# EAGLE board MegaU4Dev_SnR (EAGLE 5.11), part 1 of 2
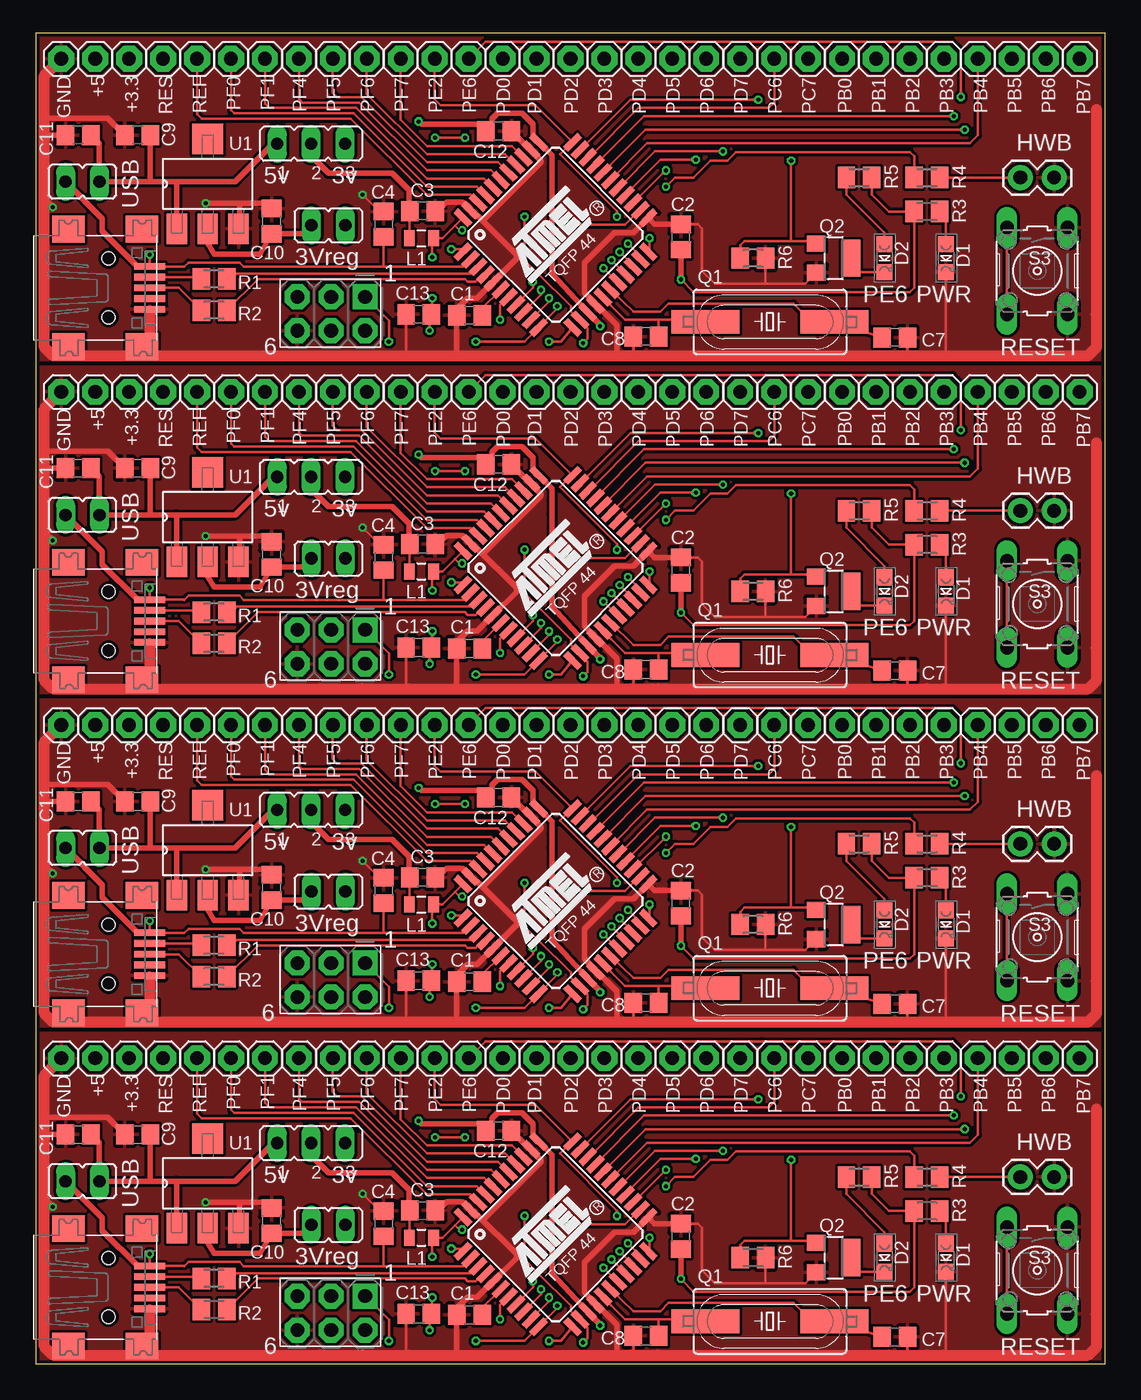
[diagram p0: board, top side]
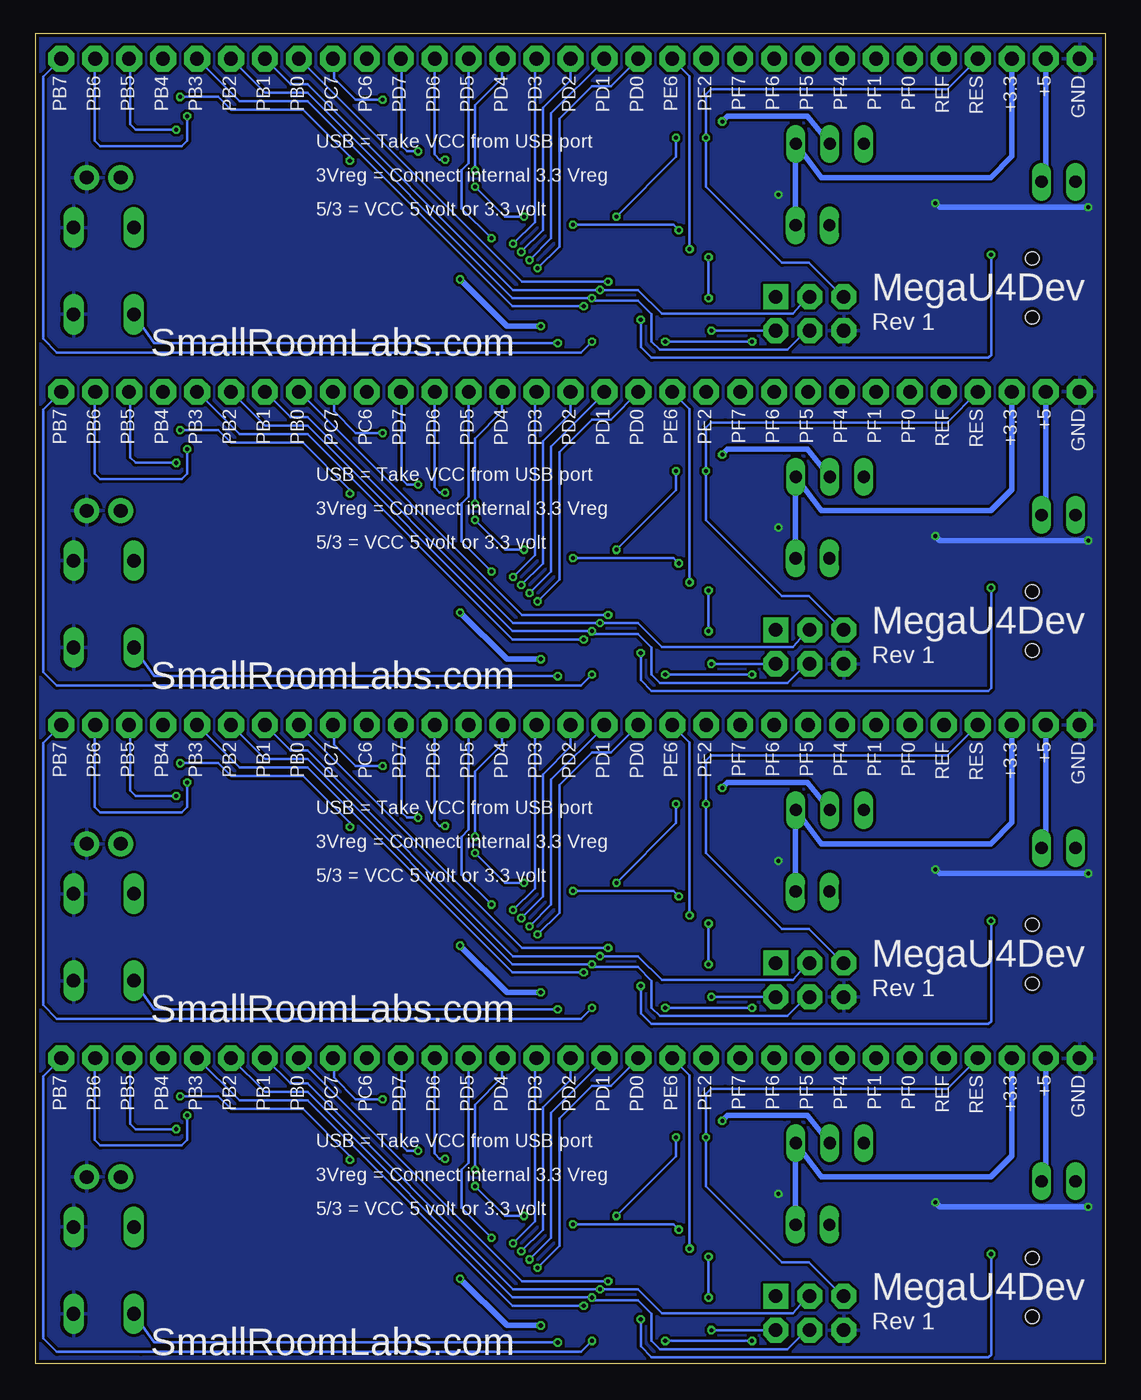
[diagram p1: board, bottom side, seen from below]

Size 80 x 99.52 mm. Coordinates in mm from the lower left corner, seen from the top.
Outline: 0,0 80,0 80,99.52 0,99.52 0,0
Copper layers (1*16): Top 0.035mm / dielectric 1.5mm / Bottom 0.035mm
Design rules "Fusion_eagle_rule_v1.1": minimum track width 6mil, minimum drill 12mil, track to track 6mil, track to pad 6mil, pad to pad 6mil, via to via 6mil, smd to smd 0mil, copper to edge 10mil, drill to drill 10mil, minimum pad ring 10mil, minimum via ring 6mil, stop-mask expansion 2mil, vias tented up to drill 100mil, thermal gap 10mil
Net classes: 0 default: width 0.203 mm, clearance 0.203 mm

## Footprints (pad centres in the part's own frame; a part is rotated, then mirrored left to right if it is on the bottom)
1X01 = drill 1.016 pad 1.93 octagon: 1 0,0
C0805 = smd 1.3 x 1.5: 1 -0.95,0; 2 0.95,0
USB-MINIB = smd 0.5 x 2.308: D+ 0,4.064; D- -0.8,4.064; GND 1.6,4.064; ID 0.8,4.064; VBUS -1.6,4.064 | smd 2 x 2.4: GND1 -4.4,-2; GND2 -4.4,3.5; GND3 4.4,3.5; GND4 4.4,-2 | hole 1: -2.2,1; 2.2,1
CHIPLED_0805 = smd 1.2 x 1.2: A 0,-1.05; C 0,1.05
TQFP44 = smd 1.5 x 0.5: 1 -5.8,4; 2 -5.8,3.2; 3 -5.8,2.4; 4 -5.8,1.6; 5 -5.8,0.8; 6 -5.8,0; 7 -5.8,-0.8; 8 -5.8,-1.6; 9 -5.8,-2.4; 10 -5.8,-3.2; 11 -5.8,-4; 23 5.8,-4; 24 5.8,-3.2; 25 5.8,-2.4; 26 5.8,-1.6; 27 5.8,-0.8; 28 5.8,0; 29 5.8,0.8; 30 5.8,1.6; 31 5.8,2.4; 32 5.8,3.2; 33 5.8,4 | smd 0.5 x 1.5: 12 -4,-5.8; 13 -3.2,-5.8; 14 -2.4,-5.8; 15 -1.6,-5.8; 16 -0.8,-5.8; 17 0,-5.8; 18 0.8,-5.8; 19 1.6,-5.8; 20 2.4,-5.8; 21 3.2,-5.8; 22 4,-5.8; 34 4,5.8; 35 3.2,5.8; 36 2.4,5.8; 37 1.6,5.8; 38 0.8,5.8; 39 0,5.8; 40 -0.8,5.8; 41 -1.6,5.8; 42 -2.4,5.8; 43 -3.2,5.8; 44 -4,5.8
2X3-NS = drill 1.016 pad 1.88 square: 1 -2.54,-1.27 | drill 1.016 pad 1.88 octagon: 2 -2.54,1.27; 3 0,-1.27; 4 0,1.27; 5 2.54,-1.27; 6 2.54,1.27
JP1 = drill 0.914 long: 1 0,-1.27; 2 0,1.27
1X02 = drill 1.016 pad 1.88 round: 1 0,0; 2 2.54,0
JP2 = drill 0.914 long: 1 -2.54,0; 2 0,0; 3 2.54,0
0805 = smd 0.8 x 1.2: 1 -0.9,0; 2 0.9,0
SM49 = smd 5.08 x 1.778: 1 -4.826,0; 2 4.826,0
SOT23-W = smd 1.2 x 1.4: 1 -1.1,-1.3; 2 1.1,-1.3 | smd 2.8 x 1.4: 3 0,1.3
M0805 = smd 1.3 x 1.6: 1 -0.95,0; 2 0.95,0
B3F-10XX = drill 1.016 long: 1 -3.251,2.261; 2 3.251,2.261; 3 -3.251,-2.261; 4 3.251,-2.261
SOT223 = smd 2.286 x 1.524: 1 -3.353,2.311; 2 -3.353,0; 3 -3.353,-2.311 | smd 2.286 x 2.286: 4 3.353,0

## Placement (x,y rotation side)
+1  [1X01]  4.45,47.78 90 top
+2  [1X01]  4.45,72.71 90 top
+3  [1X01]  4.45,97.63 90 top
+3.1  [1X01]  6.99,47.78 90 top
+3.2  [1X01]  6.99,72.71 90 top
+3.3  [1X01]  6.99,22.86 90 top
+3.4  [1X01]  6.99,97.63 90 top
+5  [1X01]  4.45,22.86 90 top
C1  1uF  [C0805]  32.45,3.66 0 top
C2  100nF  [C0805]  48.26,9.53 270 top
C3  100nF  [C0805]  28.93,11.47 180 top
C4  100nF  [C0805]  26.04,10.48 270 top
C5  1uF  [C0805]  32.45,28.58 0 top
C6  100nF  [C0805]  48.26,34.45 270 top
C7  22pF  [C0805]  64.27,2.01 0 top
C8  22pF  [C0805]  45.66,2.08 180 top
C9  100nF  [C0805]  7.62,17.14 0 top
C10  10uF  [C0805]  17.64,10.71 270 top
C11  10uF  [C0805]  3.18,17.14 0 top
C12  10uF  [C0805]  34.63,17.44 180 top
C13  100nF  [C0805]  28.65,3.73 180 top
C14  100nF  [C0805]  28.93,36.39 180 top
C15  22pF  [C0805]  64.27,26.93 0 top
C16  22pF  [C0805]  45.66,27.01 180 top
C17  100nF  [C0805]  7.62,42.07 0 top
C18  10uF  [C0805]  17.64,35.63 270 top
C19  10uF  [C0805]  34.63,42.36 180 top
C20  10uF  [C0805]  3.18,42.07 0 top
C21  100nF  [C0805]  28.65,28.66 180 top
C22  100nF  [C0805]  26.04,35.4 270 top
C23  1uF  [C0805]  32.45,53.51 0 top
C24  100nF  [C0805]  48.26,59.37 270 top
C25  100nF  [C0805]  28.93,61.32 180 top
C26  22pF  [C0805]  64.27,51.85 0 top
C27  22pF  [C0805]  45.66,51.93 180 top
C28  100nF  [C0805]  7.62,66.99 0 top
C29  10uF  [C0805]  17.64,60.55 270 top
C30  10uF  [C0805]  34.63,67.28 180 top
C31  10uF  [C0805]  3.18,66.99 0 top
C32  100nF  [C0805]  28.65,53.58 180 top
C33  100nF  [C0805]  26.04,60.33 270 top
C34  1uF  [C0805]  32.45,78.43 0 top
C35  100nF  [C0805]  48.26,84.3 270 top
C36  100nF  [C0805]  28.93,86.24 180 top
C37  22pF  [C0805]  64.27,76.78 0 top
C38  22pF  [C0805]  45.66,76.85 180 top
C39  100nF  [C0805]  7.62,91.92 0 top
C40  10uF  [C0805]  17.64,85.48 270 top
C41  10uF  [C0805]  34.63,92.21 180 top
C42  10uF  [C0805]  3.18,91.92 0 top
C43  100nF  [C0805]  28.65,78.51 180 top
C44  100nF  [C0805]  26.04,85.25 270 top
CN1  [USB-MINIB]  4.45,5.71 270 top
CN2  [USB-MINIB]  4.45,30.64 270 top
CN3  [USB-MINIB]  4.45,55.56 270 top
CN4  [USB-MINIB]  4.45,80.49 270 top
D1  LEDSMD0805  [CHIPLED_0805]  68.1,7.94 180 top
D2  LEDSMD0805  [CHIPLED_0805]  63.5,7.94 180 top
D3  LEDSMD0805  [CHIPLED_0805]  63.5,32.86 180 top
D4  LEDSMD0805  [CHIPLED_0805]  68.1,32.86 180 top
D5  LEDSMD0805  [CHIPLED_0805]  63.5,57.78 180 top
D6  LEDSMD0805  [CHIPLED_0805]  68.1,57.78 180 top
D7  LEDSMD0805  [CHIPLED_0805]  63.5,82.71 180 top
D8  LEDSMD0805  [CHIPLED_0805]  68.1,82.71 180 top
GND  [1X01]  1.91,22.86 90 top
GND1  [1X01]  1.91,47.78 90 top
GND2  [1X01]  1.91,72.71 90 top
GND3  [1X01]  1.91,97.63 90 top
IC1  ATMEGA32U4-AU  [TQFP44]  38.89,34.61 45 top
IC2  ATMEGA32U4-AU  [TQFP44]  38.89,9.69 45 top
IC3  ATMEGA32U4-AU  [TQFP44]  38.89,59.53 45 top
IC4  ATMEGA32U4-AU  [TQFP44]  38.89,84.46 45 top
J1  AVR_SPI_PRG_6NS  [2X3-NS]  22.1,3.78 180 top
J2  AVR_SPI_PRG_6NS  [2X3-NS]  22.1,28.71 180 top
J3  AVR_SPI_PRG_6NS  [2X3-NS]  22.1,53.63 180 top
J4  AVR_SPI_PRG_6NS  [2X3-NS]  22.1,78.56 180 top
JP1  [JP1]  3.49,13.65 270 top
JP2  [1X02]  73.66,13.97 0 top
JP3  [JP2]  20.6,16.5 0 top
JP4  [JP1]  21.89,10.4 90 top
JP5  [1X02]  73.66,38.89 0 top
JP6  [JP2]  20.6,41.42 0 top
JP7  [JP1]  21.89,35.33 90 top
JP8  [JP1]  3.49,38.58 270 top
JP9  [1X02]  73.66,63.82 0 top
JP10  [JP2]  20.6,66.34 0 top
JP11  [JP1]  21.89,60.25 90 top
JP12  [JP1]  3.49,63.5 270 top
JP13  [1X02]  73.66,88.74 0 top
JP14  [JP2]  20.6,91.27 0 top
JP15  [JP1]  21.89,85.17 90 top
JP16  [JP1]  3.49,88.42 270 top
L1  [0805]  28.85,9.42 0 top
L2  [0805]  28.85,34.35 0 top
L3  [0805]  28.85,59.27 0 top
L4  [0805]  28.85,84.19 0 top
PB0  [1X01]  60.33,22.86 90 top
PB1  [1X01]  62.87,22.86 90 top
PB2  [1X01]  65.41,22.86 90 top
PB3  [1X01]  67.95,22.86 90 top
PB4  [1X01]  70.49,22.86 90 top
PB5  [1X01]  73.03,22.86 90 top
PB6  [1X01]  75.57,22.86 90 top
PB7  [1X01]  78.11,22.86 90 top
PB8  [1X01]  78.11,47.78 90 top
PB9  [1X01]  75.57,47.78 90 top
PB10  [1X01]  73.03,47.78 90 top
PB11  [1X01]  70.49,47.78 90 top
PB12  [1X01]  67.95,47.78 90 top
PB13  [1X01]  65.41,47.78 90 top
PB14  [1X01]  62.87,47.78 90 top
PB15  [1X01]  60.33,47.78 90 top
PB16  [1X01]  78.11,72.71 90 top
PB17  [1X01]  75.57,72.71 90 top
PB18  [1X01]  73.03,72.71 90 top
PB19  [1X01]  70.49,72.71 90 top
PB20  [1X01]  67.95,72.71 90 top
PB21  [1X01]  65.41,72.71 90 top
PB22  [1X01]  62.87,72.71 90 top
PB23  [1X01]  60.33,72.71 90 top
PB24  [1X01]  78.11,97.63 90 top
PB25  [1X01]  75.57,97.63 90 top
PB26  [1X01]  73.03,97.63 90 top
PB27  [1X01]  70.49,97.63 90 top
PB28  [1X01]  67.95,97.63 90 top
PB29  [1X01]  65.41,97.63 90 top
PB30  [1X01]  62.87,97.63 90 top
PB31  [1X01]  60.33,97.63 90 top
PC1  [1X01]  57.79,47.78 90 top
PC2  [1X01]  55.25,47.78 90 top
PC3  [1X01]  57.79,72.71 90 top
PC4  [1X01]  55.25,72.71 90 top
PC5  [1X01]  57.79,97.63 90 top
PC6  [1X01]  55.25,22.86 90 top
PC7  [1X01]  57.79,22.86 90 top
PC8  [1X01]  55.25,97.63 90 top
PD0  [1X01]  34.93,22.86 90 top
PD1  [1X01]  37.47,22.86 90 top
PD2  [1X01]  40.01,22.86 90 top
PD3  [1X01]  42.55,22.86 90 top
PD4  [1X01]  45.09,22.86 90 top
PD5  [1X01]  47.63,22.86 90 top
PD6  [1X01]  50.17,22.86 90 top
PD7  [1X01]  52.71,22.86 90 top
PD8  [1X01]  52.71,47.78 90 top
PD9  [1X01]  50.17,47.78 90 top
PD10  [1X01]  47.63,47.78 90 top
PD11  [1X01]  45.09,47.78 90 top
PD12  [1X01]  42.55,47.78 90 top
PD13  [1X01]  40.01,47.78 90 top
PD14  [1X01]  37.47,47.78 90 top
PD15  [1X01]  34.93,47.78 90 top
PD16  [1X01]  52.71,72.71 90 top
PD17  [1X01]  50.17,72.71 90 top
PD18  [1X01]  47.63,72.71 90 top
PD19  [1X01]  45.09,72.71 90 top
PD20  [1X01]  42.55,72.71 90 top
PD21  [1X01]  40.01,72.71 90 top
PD22  [1X01]  37.47,72.71 90 top
PD23  [1X01]  34.93,72.71 90 top
PD24  [1X01]  52.71,97.63 90 top
PD25  [1X01]  50.17,97.63 90 top
PD26  [1X01]  47.63,97.63 90 top
PD27  [1X01]  45.09,97.63 90 top
PD28  [1X01]  42.55,97.63 90 top
PD29  [1X01]  40.01,97.63 90 top
PD30  [1X01]  37.47,97.63 90 top
PD31  [1X01]  34.93,97.63 90 top
PE1  [1X01]  32.39,47.78 90 top
PE2  [1X01]  29.85,22.86 90 top
PE3  [1X01]  29.85,47.78 90 top
PE4  [1X01]  32.39,72.71 90 top
PE5  [1X01]  29.85,72.71 90 top
PE6  [1X01]  32.39,22.86 90 top
PE7  [1X01]  32.39,97.63 90 top
PE8  [1X01]  29.85,97.63 90 top
PF0  [1X01]  14.61,22.86 90 top
PF1  [1X01]  17.15,22.86 90 top
PF2  [1X01]  27.31,47.78 90 top
PF3  [1X01]  24.77,47.78 90 top
PF4  [1X01]  19.69,22.86 90 top
PF5  [1X01]  22.23,22.86 90 top
PF6  [1X01]  24.77,22.86 90 top
PF7  [1X01]  27.31,22.86 90 top
PF8  [1X01]  22.23,47.78 90 top
PF9  [1X01]  19.69,47.78 90 top
PF10  [1X01]  17.15,47.78 90 top
PF11  [1X01]  14.61,47.78 90 top
PF12  [1X01]  27.31,72.71 90 top
PF13  [1X01]  24.77,72.71 90 top
PF14  [1X01]  22.23,72.71 90 top
PF15  [1X01]  19.69,72.71 90 top
PF16  [1X01]  17.15,72.71 90 top
PF17  [1X01]  14.61,72.71 90 top
PF18  [1X01]  27.31,97.63 90 top
PF19  [1X01]  24.77,97.63 90 top
PF20  [1X01]  22.23,97.63 90 top
PF21  [1X01]  19.69,97.63 90 top
PF22  [1X01]  17.15,97.63 90 top
PF23  [1X01]  14.61,97.63 90 top
Q1  [SM49]  54.93,3.17 0 top
Q2  [SOT23-W]  59.69,7.94 270 top
Q3  [SM49]  54.93,28.1 0 top
Q4  [SOT23-W]  59.69,32.86 270 top
Q5  [SM49]  54.93,53.02 0 top
Q6  [SOT23-W]  59.69,57.78 270 top
Q7  [SM49]  54.93,77.95 0 top
Q8  [SOT23-W]  59.69,82.71 270 top
R1  22R  [M0805]  13.34,6.38 0 top
R2  22R  [M0805]  13.34,4.04 0 top
R3  1K  [M0805]  66.68,11.43 0 top
R4  1K  [M0805]  66.68,13.97 180 top
R5  1K  [M0805]  61.6,13.97 180 top
R6  1K  [M0805]  53.66,7.94 0 top
R7  22R  [M0805]  13.34,31.3 0 top
R8  22R  [M0805]  13.34,28.96 0 top
R9  1K  [M0805]  66.68,38.89 180 top
R10  1K  [M0805]  66.68,36.35 0 top
R11  1K  [M0805]  61.6,38.89 180 top
R12  1K  [M0805]  53.66,32.86 0 top
R13  22R  [M0805]  13.34,56.22 0 top
R14  22R  [M0805]  13.34,53.89 0 top
R15  1K  [M0805]  66.68,63.82 180 top
R16  1K  [M0805]  66.68,61.28 0 top
R17  1K  [M0805]  61.6,63.82 180 top
R18  1K  [M0805]  53.66,57.78 0 top
R19  22R  [M0805]  13.34,81.15 0 top
R20  22R  [M0805]  13.34,78.81 0 top
R21  1K  [M0805]  66.68,88.74 180 top
R22  1K  [M0805]  66.68,86.2 0 top
R23  1K  [M0805]  61.6,88.74 180 top
R24  1K  [M0805]  53.66,82.71 0 top
REF  [1X01]  12.07,22.86 90 top
REF1  [1X01]  12.07,47.78 90 top
REF2  [1X01]  12.07,72.71 90 top
REF3  [1X01]  12.07,97.63 90 top
RES  [1X01]  9.53,22.86 90 top
RES1  [1X01]  9.53,47.78 90 top
RES2  [1X01]  9.53,72.71 90 top
RES3  [1X01]  9.53,97.63 90 top
S1  Reset  [B3F-10XX]  74.93,31.91 270 top
S2  Reset  [B3F-10XX]  74.93,56.83 270 top
S3  Reset  [B3F-10XX]  74.93,6.99 270 top
S4  Reset  [B3F-10XX]  74.93,81.76 270 top
U1  TLV1117-33CDCYW  [SOT223]  12.86,13.49 90 top
U2  TLV1117-33CDCYW  [SOT223]  12.86,38.42 90 top
U3  TLV1117-33CDCYW  [SOT223]  12.86,63.34 90 top
U4  TLV1117-33CDCYW  [SOT223]  12.86,88.27 90 top
U$1  [SRL-LOGO-BSTOP-10MM]  71.12,2.86 0 top
U$2  [SRL-LOGO-BSTOP-10MM]  71.12,27.78 0 top
U$3  [SRL-LOGO-BSTOP-10MM]  71.12,52.7 0 top
U$4  [SRL-LOGO-BSTOP-10MM]  71.12,77.63 0 top

## Library data of the parts
+1-+3 +3.1-+3.4 +5 CN1-CN4 GND GND1-GND3 PB0 PB1-PB31 PC1-PC8 PD0 PD1-PD31 PE1-PE8 PF0 PF1-PF23 REF REF1-REF3 RES RES1-RES3 = adafruit
C1-C44 R1-R24 = rcl
D1-D8 U1-U4 U$1-U$4 = SmallRoomLabs
IC1-IC4 = mega32U4
J1-J4 JP2 JP5 JP9 JP13 L1-L4 = SparkFun
JP1 JP3 JP4 JP6-JP8 JP10-JP12 JP14-JP16 = jumper
Q1 Q3 Q5 Q7 = crystal; OC_FARNELL: unknown; OC_NEWARK: unknown
Q2 Q4 Q6 Q8 = microbuilder
S1-S4 = switch-omron; MPN: B3F-1000; OC_FARNELL: 176432; OC_NEWARK: 36M3542

## Nets
3V1: C18.2 JP7.2 U2.2
3V2: C29.2 JP11.2 U3.2
3V3: C10.2 JP4.2 U1.2
3V4: C40.2 JP15.2 U4.2
AREF: IC2.42 REF.1
AREF1: IC1.42 REF1.1
AREF2: IC3.42 REF2.1
AREF3: IC4.42 REF3.1
AVCC: C13.1 IC2.24 IC2.44 J1.2 L1.2
AVCC1: C21.1 IC1.24 IC1.44 J2.2 L2.2
AVCC2: C32.1 IC3.24 IC3.44 J3.2 L3.2
AVCC3: C43.1 IC4.24 IC4.44 J4.2 L4.2
D+: IC2.4 R2.2
D+1: IC1.4 R8.2
D+2: IC3.4 R14.2
D+3: IC4.4 R20.2
D-: IC2.3 R1.2
D-1: IC1.3 R7.2
D-2: IC3.3 R13.2
D-3: IC4.3 R19.2
EXT1: +1.1 C17.2 C20.2 JP6.1 JP8.2 U2.1
EXT2: +3.1.1 JP6.3 JP7.1
EXT3: +3.3.1 JP3.3 JP4.1
EXT4: +2.1 C28.2 C31.2 JP10.1 JP12.2 U3.1
EXT5: +5.1 C9.2 C11.2 JP1.2 JP3.1 U1.1
EXT6: +3.2.1 JP10.3 JP11.1
EXT7: +3.1 C39.2 C42.2 JP14.1 JP16.2 U4.1
EXT8: +3.4.1 JP14.3 JP15.1
GND: C1.1 C2.1 C3.1 C4.1 C7.2 C8.2 C9.1 C10.1 C11.1 C12.1 C13.2 CN1.GND D1.C GND.1 IC2.5 IC2.15 IC2.23 IC2.35 IC2.43 J1.6 JP2.2 Q2.2 R6.2 S3.1 S3.2 U1.3
GND1: C5.1 C6.1 C14.1 C15.2 C16.2 C17.1 C18.1 C19.1 C20.1 C21.2 C22.1 CN2.GND D4.C GND1.1 IC1.5 IC1.15 IC1.23 IC1.35 IC1.43 J2.6 JP5.2 Q4.2 R12.2 S1.1 S1.2 U2.3
GND2: C23.1 C24.1 C25.1 C26.2 C27.2 C28.1 C29.1 C30.1 C31.1 C32.2 C33.1 CN3.GND D6.C GND2.1 IC3.5 IC3.15 IC3.23 IC3.35 IC3.43 J3.6 JP9.2 Q6.2 R18.2 S2.1 S2.2 U3.3
GND3: C34.1 C35.1 C36.1 C37.2 C38.2 C39.1 C40.1 C41.1 C42.1 C43.2 C44.1 CN4.GND D8.C GND3.1 IC4.5 IC4.15 IC4.23 IC4.35 IC4.43 J4.6 JP13.2 Q8.2 R24.2 S4.1 S4.2 U4.3
N$1: JP2.1 R4.1
N$2: CN1.D- R1.1
N$3: CN1.D+ R2.1
N$4: CN2.D- R7.1
N$5: D2.A R5.2
N$6: D1.A R3.2
N$7: D2.C Q2.3
N$8: CN2.D+ R8.1
N$9: JP5.1 R9.1
N$10: D4.A R10.2
N$11: D3.A R11.2
N$12: D3.C Q4.3
N$13: CN3.D- R13.1
N$14: CN3.D+ R14.1
N$15: JP9.1 R15.1
N$16: D6.A R16.2
N$17: D5.A R17.2
N$18: D5.C Q6.3
N$19: CN4.D- R19.1
N$20: CN4.D+ R20.1
N$21: JP13.1 R21.1
N$22: D8.A R22.2
N$23: D7.A R23.2
N$24: D7.C Q8.3
PB0: IC2.8 PB0.1
PB1: IC2.9 J1.3 PB1.1
PB2: IC2.10 J1.4 PB2.1
PB3: IC2.11 J1.1 PB3.1
PB4: IC2.28 PB4.1
PB5: IC2.29 PB5.1
PB6: IC2.30 PB6.1
PB7: IC2.12 PB7.1
PB8: IC1.9 J2.3 PB14.1
PB9: IC1.11 J2.1 PB12.1
PB10: IC1.10 J2.4 PB13.1
PB11: IC1.28 PB11.1
PB12: IC1.29 PB10.1
PB13: IC1.30 PB9.1
PB14: IC1.12 PB8.1
PB15: IC1.8 PB15.1
PB16: IC3.9 J3.3 PB22.1
PB17: IC3.11 J3.1 PB20.1
PB18: IC3.10 J3.4 PB21.1
PB19: IC3.28 PB19.1
PB20: IC3.29 PB18.1
PB21: IC3.30 PB17.1
PB22: IC3.12 PB16.1
PB23: IC3.8 PB23.1
PB24: IC4.9 J4.3 PB30.1
PB25: IC4.11 J4.1 PB28.1
PB26: IC4.10 J4.4 PB29.1
PB27: IC4.28 PB27.1
PB28: IC4.29 PB26.1
PB29: IC4.30 PB25.1
PB30: IC4.12 PB24.1
PB31: IC4.8 PB31.1
PC1: IC1.31 PC2.1
PC2: IC1.32 PC1.1
PC3: IC3.31 PC4.1
PC4: IC3.32 PC3.1
PC5: IC4.31 PC8.1
PC6: IC2.31 PC6.1
PC7: IC2.32 PC7.1
PC8: IC4.32 PC5.1
PD0: IC2.18 PD0.1
PD1: IC2.19 PD1.1
PD2: IC2.20 PD2.1
PD3: IC2.21 PD3.1
PD4: IC2.25 PD4.1
PD5: IC2.22 PD5.1
PD6: IC2.26 PD6.1
PD7: IC2.27 PD7.1
PD8: IC1.19 PD14.1
PD9: IC1.18 PD15.1
PD10: IC1.21 PD12.1
PD11: IC1.25 PD11.1
PD12: IC1.22 PD10.1
PD13: IC1.26 PD9.1
PD14: IC1.27 PD8.1
PD15: IC1.20 PD13.1
PD16: IC3.19 PD22.1
PD17: IC3.18 PD23.1
PD18: IC3.21 PD20.1
PD19: IC3.25 PD19.1
PD20: IC3.22 PD18.1
PD21: IC3.26 PD17.1
PD22: IC3.27 PD16.1
PD23: IC3.20 PD21.1
PD24: IC4.19 PD30.1
PD25: IC4.18 PD31.1
PD26: IC4.21 PD28.1
PD27: IC4.25 PD27.1
PD28: IC4.22 PD26.1
PD29: IC4.26 PD25.1
PD30: IC4.27 PD24.1
PD31: IC4.20 PD29.1
PE1: IC1.33 PE3.1 R9.2
PE2: IC2.33 PE2.1 R4.2
PE3: IC1.1 PE1.1 Q4.1 R12.1
PE4: IC3.33 PE5.1 R15.2
PE5: IC3.1 PE4.1 Q6.1 R18.1
PE6: IC2.1 PE6.1 Q2.1 R6.1
PE7: IC4.33 PE8.1 R21.2
PE8: IC4.1 PE7.1 Q8.1 R24.1
PF0: IC2.41 PF0.1
PF1: IC2.40 PF1.1
PF2: IC1.41 PF11.1
PF3: IC1.40 PF10.1
PF4: IC2.39 PF4.1
PF5: IC2.38 PF5.1
PF6: IC2.37 PF6.1
PF7: IC2.36 PF7.1
PF8: IC1.39 PF9.1
PF9: IC1.38 PF8.1
PF10: IC1.37 PF3.1
PF11: IC1.36 PF2.1
PF12: IC3.41 PF17.1
PF13: IC3.40 PF16.1
PF14: IC3.39 PF15.1
PF15: IC3.38 PF14.1
PF16: IC3.37 PF13.1
PF17: IC3.36 PF12.1
PF18: IC4.41 PF23.1
PF19: IC4.40 PF22.1
PF20: IC4.39 PF21.1
PF21: IC4.38 PF20.1
PF22: IC4.37 PF19.1
PF23: IC4.36 PF18.1
RESET: IC2.13 J1.5 RES.1 S3.3 S3.4
RESET1: IC1.13 J2.5 RES1.1 S1.3 S1.4
RESET2: IC3.13 J3.5 RES2.1 S2.3 S2.4
RESET3: IC4.13 J4.5 RES3.1 S4.3 S4.4
UCAP: C1.2 IC2.6
UCAP1: C5.2 IC1.6
UCAP2: C23.2 IC3.6
UCAP3: C34.2 IC4.6
VBUS: C4.2 CN1.VBUS IC2.2 IC2.7 JP1.1
VBUS1: C22.2 CN2.VBUS IC1.2 IC1.7 JP8.1
VBUS2: C33.2 CN3.VBUS IC3.2 IC3.7 JP12.1
VBUS3: C44.2 CN4.VBUS IC4.2 IC4.7 JP16.1
VCC: C2.2 C3.2 C12.2 IC2.14 IC2.34 JP3.2 L1.1 R3.1 R5.1
VCC1: C6.2 C14.2 C19.2 IC1.14 IC1.34 JP6.2 L2.1 R10.1 R11.1
VCC2: C24.2 C25.2 C30.2 IC3.14 IC3.34 JP10.2 L3.1 R16.1 R17.1
VCC3: C35.2 C36.2 C41.2 IC4.14 IC4.34 JP14.2 L4.1 R22.1 R23.1
XTAL1: C7.1 IC2.17 Q1.2
XTAL2: C8.1 IC2.16 Q1.1
XTAL3: C15.1 IC1.17 Q3.2
XTAL4: C16.1 IC1.16 Q3.1
XTAL5: C26.1 IC3.17 Q5.2
XTAL6: C27.1 IC3.16 Q5.1
XTAL7: C37.1 IC4.17 Q7.2
XTAL8: C38.1 IC4.16 Q7.1